# Altium PCB DE-180417.PcbDoc
Units mm, origin at the board's own origin, x right, y up, seen from the top; angles counter-clockwise.
Board outline 138.68 x 62.38 mm, 2 copper layers (Top Layer, Bottom Layer); 113 components, 89 nets, 384 pads, 0 vias.
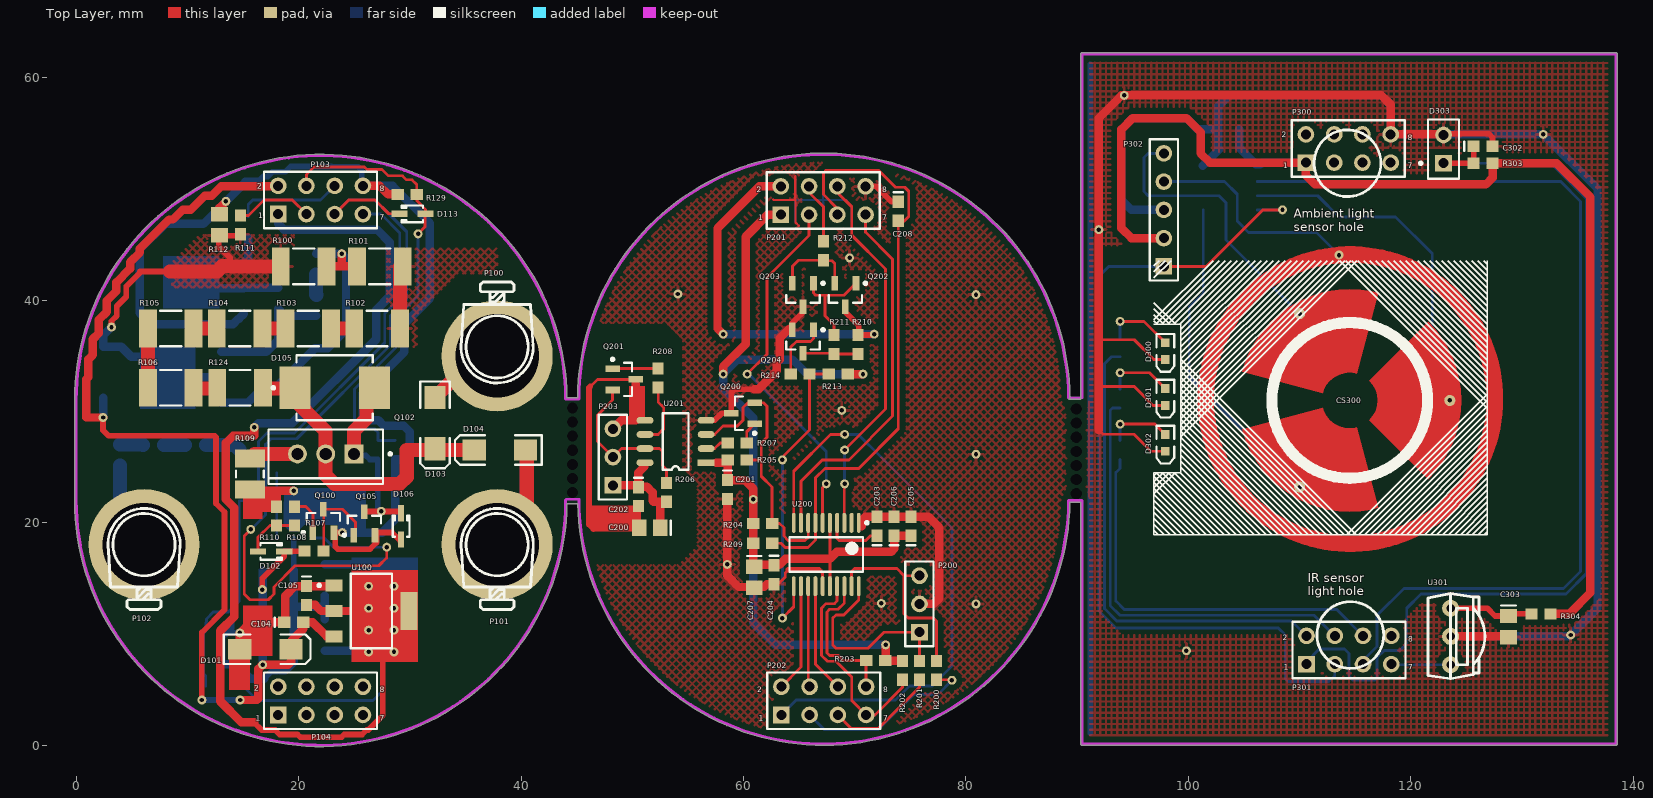
[diagram p0: Top Layer view]
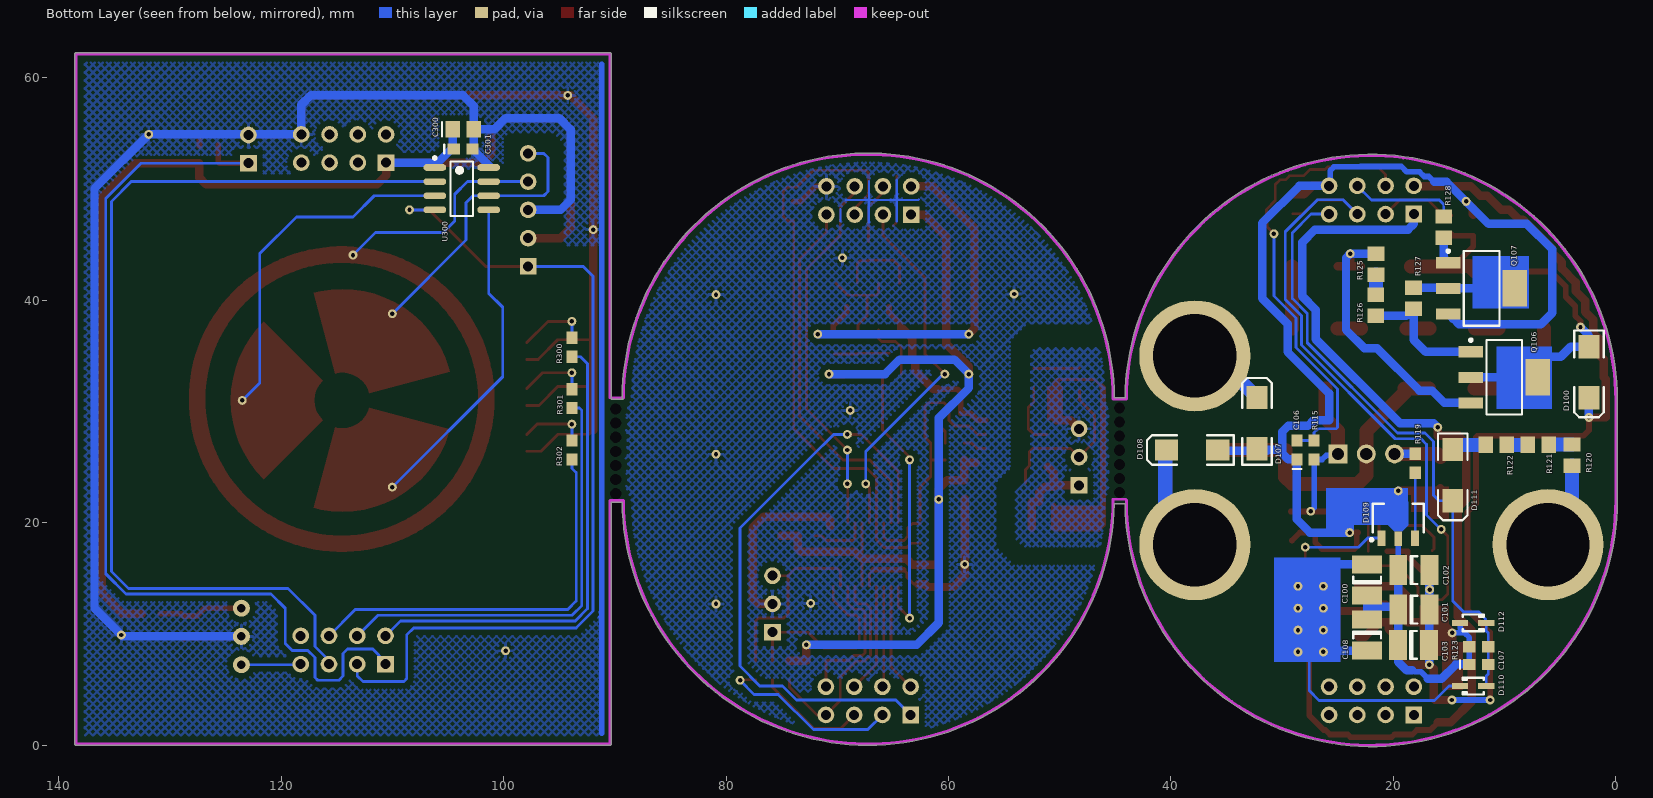
[diagram p1: Bottom Layer view, seen from below]

## Layer stack, top to bottom
Top Solder: solder mask 0.0102, Solder Resist, Dk 3.5
Top Layer: signal copper 0.0356
Dielectric 1: dielectric 0.32, FR-4, Dk 4.8
Bottom Layer: signal copper 0.0356
Bottom Solder: solder mask 0.0102, Solder Resist, Dk 3.5

## Board outline
-0.127,22 ccw(c22,22) 44.126,21.717 45.088,21.717 ccw(c67.212,22.115) 89.338,21.864 90.297,21.864 90.297,0.127 ccw(c90.424,0.127) 90.424,0 138.424,0 ccw(c138.424,0.127) 138.551,0.127 138.551,62.127 ccw(c138.424,62.127) 138.424,62.254 90.424,62.254 ccw(c90.424,62.127) 90.297,62.127 90.297,31.115 89.244,31.115 ccw(c89.212,31.239) 89.339,31.239 ccw(c89.212,31.239) 89.339,31.239 ccw(c67.212,31.115) 45.085,31.242 44.126,31.242 ccw(c22,31) -0.127,31

## Design rules (kind name [scope] priority, off if disabled: settings)
Clearance [All] p1: gap=0.254 except(0.508: Arc-Poly Track-Poly SMDPad-Poly THPad-Poly Via-Poly Fill-Poly Poly-Poly)
PolygonConnect [All] p1: connectstyle=Relief reliefconductorwidth=0.254 reliefentries=4 polygonreliefangle="90 Angle" airgapwidth=0.254
RoutingVias [All] p1: holewidth=0.711 width=1.27 viastyle="Through Hole" minholewidth=0.711 minwidth=1.27 maxholewidth=0.711 maxwidth=1.27
SolderMaskExpansion [All] p1: expansion=0.102
Width [All] p1: maxlimit=4 minlimit=0.127 preferedwidth=0.762
30 further rules are at their usual default settings.

## Classes and differential pairs
component class DE-180417_01: C100 C101 C102 C103 C104 C105 C106 C107 C108 D100 D101 D102 D103 D104 D105 D106 D107 D108 D109 D110 D111 D112 D113 P100 P101 P102 P103 P104 Q100 Q102 Q105 Q106 Q107 R100 R101 R102 R103 R104 R105 R106 R107 R108 R109 R110 R111 R112 R115 R119 R120 R121 R122 R123 R124 R125 R126 R127 R128 R129 U100
component class DE-180417_02: C200 C201 C202 C203 C204 C205 C206 C207 C208 P200 P201 P202 P203 Q200 Q201 Q202 Q203 Q204 R200 R201 R202 R203 R204 R205 R206 R207 R208 R209 R210 R211 R212 R213 R214 U200 U201
component class DE-180417_03: C300 C301 C302 C303 CS300 D300 D301 D302 D303 P300 P301 P302 R300 R301 R302 R303 R304 U300 U301

## Components (designator, comment, footprint, x,y, rotation, side; value= is the part's Value field where it differs from the comment)
C100 "C1210" 1210 22.352,14.859 r90 bottom
C101 "C1210" 1210 18.161,12.192 r180 bottom
C102 "C1210" 1210 18.161,15.748 r180 bottom
C103 "C1210" 1210 18.186,9.017 r180 bottom
C104 "100nF" 0603 19.558,11.049 r0 top
C105 "100nF" 0603 20.701,13.462 r270 top
C106 "22nF" 0603 28.677,26.543 r90 bottom
C107 "100nF" 0603 12.319,7.264 r180 bottom
C108 "C1210" 1210 22.352,9.906 r270 bottom
C200 "50V" 0805 51.562,19.558 r180 top
C201 "100nF" 0603 58.547,22.987 r270 top
C202 "100nF" 0603 50.546,22.352 r270 top
C203 "50V" 0603 72.009,19.685 r90 top
C204 "50V" 0603 62.738,15.328 r270 top
C205 "50V" 0603 75.057,19.685 r90 top
C206 "50V" 0603 73.533,19.685 r90 top
C207 "50V" 0805 60.96,15.113 r270 top
C208 "220nF" 0603 73.914,48.006 r270 top
C300 "50V" 0805 103.632,55.372 r180 bottom
C301 "50V" 0603 103.632,53.594 r180 bottom
C302 "50V" 0603 126.492,53.848 r0 top
C303 "10uF" 0805 128.778,10.668 r270 top
CS300 "Small QTouch Wheel" ? 114.5,31 r270 top
D100 "1N4007" DO214 2.413,33.528 r270 bottom
D101 "SMA" DO214 17.018,8.636 r0 top
D102 "8V2" SOD323 17.526,17.424 r0 top
D103 "S3M" DO214 32.258,28.956 r270 top
D104 "S3M" DO214 38.1,26.543 r180 top
D105 "P4SMA400A" ONSC-SMC-2-403-03_V 23.241,32.131 r0 top
D106 "16V" SOD323 29.21,19.685 r90 top
D107 "S3M" DO214 32.258,28.956 r90 bottom
D108 "S3M" DO214 38.1,26.543 r0 bottom
D109 "MCR100-8" INF-SOT89_N 19.558,20.168 r90 bottom
D110 "1N4148" SOD323 12.819,5.309 r0 bottom
D111 "1N4007" DO214 14.656,24.282 r270 bottom
D112 "1N4148" SOD323 12.819,10.998 r180 bottom
D113 "1N4148" SOD323 30.226,47.777 r180 top
D300 "LED_RED" 1.6X0.8X0.8 97.917,35.433 r270 top
D301 "LED_GREEN" 1.6X0.8X0.8 97.917,31.305 r270 top
D302 "LED_BLUE" 1.6X0.8X0.8 97.917,27.178 r270 top
D303 "Photo Sen" PIN2 122.936,52.324 r90 top
P100 "Single Wire Lug" "Single Wire Lug"#1 37.846,35.814 r0 top
P101 "Single Wire Lug" "Single Wire Lug"#2 37.846,18.034 r180 top
P102 "Single Wire Lug" "Single Wire Lug"#2 6.096,18.034 r180 top
P103 "CON_A" HDR2X4 18.161,47.752 r0 top locked
P104 "CON_B" HDR2X4 18.161,2.718 r0 top locked
P200 "ICSP" HDR1X3 75.819,10.16 r90 top
P201 "CON_A" HDR2X4 63.348,47.701 r0 top locked
P202 "CON_B" HDR2X4 63.398,2.718 r0 top locked
P203 "COM" HDR1X3 48.26,23.368 r90 top
P300 "CON_A" HDR2X4 110.566,52.375 r0 top locked
P301 "CON_B" HDR2X4 110.617,7.29 r0 top locked
P302 "ICSP" HDR1X5 97.79,43.053 r90 top
Q100 "MMBT2222" SOT23_N 22.225,20.168 r90 top
Q102 "NGTB15N60EG" ONSC-TO-220-3-221A-09 22.428,26.187 r270 top
Q105 "MMBT2222" SOT23_N 25.908,19.939 r90 top
Q106 "PBHV9540Z" SOT223_N 10.033,33.071 r180 bottom
Q107 "PBHV8540Z" SOT223_N 12.065,41.072 r180 bottom
Q200 "MMBT3906" SOT23_N 59.944,29.845 r180 top
Q201 "MMBT3906" SOT23_N 49.276,32.893 r0 top
Q202 "MMBT2222" SOT23_N 69.154,40.479 r270 top
Q203 "MMBT3906" SOT23_N 65.344,40.479 r270 top
Q204 "MMBT2222" SOT23_N 65.344,36.288 r270 top
R100 "1812" 12-1812 20.447,43.053 r0 top
R101 "1812" 12-1812 27.305,43.053 r0 top
R102 "1812" 12-1812 27.051,37.465 r180 top
R103 "1812" 12-1812 20.87,37.465 r180 top
R104 "1812" 12-1812 14.69,37.465 r180 top
R105 "1812" 12-1812 8.509,37.465 r180 top
R106 "1812" 12-1812 8.509,32.131 r0 top
R107 "150K" ERA-0603 21.387,17.45 r0 top
R108 "47K" ERA-0603 19.634,20.599 r90 top
R109 "1210" 14-1210 15.621,24.384 r90 top
R110 "47K" ERA-0603 18.009,20.599 r90 top
R111 "100K" ERA-0603 14.757,46.787 r270 top
R112 "0802" ERA-0805 12.878,46.787 r270 top
R115 "3K3" ERA-0603 27.127,26.543 r270 bottom
R119 "22R" ERA-0603 18.034,25.349 r90 bottom
R120 "0802" ERA-0805 3.937,26.086 r90 bottom
R121 "0802" ERA-0805 6.96,27 r0 bottom
R122 "0802" ERA-0805 10.744,27 r0 bottom
R123 "10K" ERA-0603 12.319,8.853 r180 bottom
R124 "1812" 12-1812 14.732,32.131 r0 top
R125 "220K" ERA-0805 21.565,43.256 r270 bottom
R126 "220K" ERA-0805 21.59,39.548 r90 bottom
R127 "10K" ERA-0805 18.186,40.183 r270 bottom
R128 "3K3" ERA-0805 15.469,46.584 r270 bottom
R129 "220K" ERA-0603 29.769,49.53 r0 top
R200 "1K" ERA-0603 77.343,6.731 r90 top
R201 "1K" ERA-0603 75.819,6.731 r90 top
R202 "10K" ERA-0603 74.295,6.731 r90 top
R203 "10K" ERA-0603 71.882,7.62 r0 top
R204 "10K" ERA-0603 61.722,19.939 r180 top
R205 "2K2" ERA-0603 59.436,25.654 r0 top
R206 "2K2" ERA-0603 53.086,22.733 r90 top
R207 "1K" ERA-0603 59.436,27.178 r180 top
R208 "1K" ERA-0603 52.324,33.02 r270 top
R209 "15K" ERA-0603 61.722,18.161 r180 top
R210 "10K" ERA-0603 70.297,36.034 r270 top
R211 "1K" ERA-0603 68.138,36.034 r270 top
R212 "15K" ERA-0603 67.183,44.45 r90 top
R213 "47K" ERA-0603 68.519,33.367 r180 top
R214 "3K3" ERA-0603 65.09,33.367 r0 top
R300 "100R" ERA-0603 93.853,35.776 r270 bottom
R301 "22R" ERA-0603 93.853,31.159 r270 bottom
R302 "22R" ERA-0603 93.853,26.543 r270 bottom
R303 "100K" ERA-0603 126.492,52.324 r180 top
R304 "220R" ERA-0603 131.699,11.811 r180 top
U100 "REG1117-3.3" ZZ311 26.543,12.065 r270 top
U200 "STM32F030F4P6" STM-TSSOP20_N 67.437,17.145 r270 top
U201 "ADuM1201" SOP8 56.642,25.4 r180 top
U300 "PIC12F1822T-I/SN" MCHP-SOIC-SN8_N 103.759,50.038 r180 bottom
U301 "38kHZ IR receiver" TSOP48 123.571,9.779 r90 top

## Footprints (in the part's own frame and the unit in brackets; to place one, negate y for a bottom-side part, rotate by r counter-clockwise, add the part's x,y. Pads: shape width x height; smd on the part's side, far side on the other; paste and mask are expansions set on the pad)
1.6X0.8X0.8 [mm] "SM LED; 2 Flat Leads"
  rect 0.8x0.8 smd: 1(-0.75,0) 2(0.75,0)
  silkscreen extent -1.55,-0.8 1.85,0.8
12-1812 [mm] "Chip Resistor; Body 4.5 x 3.2 mm (LxW typ)"
  rect 1.6x3.4 smd: 1(-2.05,0) 2(2.05,0)
  silkscreen extent -0.95,-1.6 0.95,1.6
14-1210 [mm] "Chip Resistor; Body 3.2 x 2.5 mm (LxW typ)"
  rect 1.6x2.7 smd: 1(-1.4,0) 2(1.4,0)
  silkscreen extent -0.3,-1.25 0.3,1.25
0603 [mm] "Chip Capacitor; Body 1.6 x 0.8 mm (LxW typ)"
  rect 1.1x1 smd: 1(-0.85,0) 2(0.85,0)
  silkscreen extent -1.7,-0.4 -1.7,0.4
0805 [mm] "Chip Capacitor; Body 2.0 x 1.2 mm (LxW typ)"
  rect 1.3x1.5 smd: 1(-0.95,0) 2(0.95,0)
  silkscreen extent -1.9,-0.65 -1.9,0.65
1210 [mm] "Chip Capacitor; Body 3.2 x 2.5 mm (LxW typ)"
  rect 1.6x2.7 smd: 1(-1.4,0) 2(1.4,0)
  silkscreen extent -0.3,-1.25 0.3,1.25
DO214 [mm] "DO-214-AC/SMA; 2 C-Bend Leads; Body 5.3 x 2.6 mm, inc. leads (LxW)"
  rect 2.1x1.85 smd: 1(-2.3,0) 2(2.3,0)
  silkscreen extent -3.75,-1.33 4.05,1.33
ERA-0603 [mm] "Chip Resistor; Body 1.6 x 0.8 mm (LxW typ)"
  rect 1.1x1 smd: 1(-0.85,0) 2(0.85,0)
ERA-0805 [mm] "Chip Resistor; Body 2 x 1.3 mm (LxW typ)"
  rect 1.3x1.5 smd: 1(-0.95,0) 2(0.95,0)
HDR1X3 [mm] "Connector; Header; 3 Position"
  rect 1.5x1.5 hole 0.9: 1(0,0)
  round 1.5 hole 0.9: 2(2.54,0) 3(5.08,0)
  silkscreen extent -1.27,-1.27 6.35,1.27
HDR1X5 [mm] "Connector; Header; 5 Position"
  rect 1.5x1.5 hole 0.9: 1(0,0)
  round 1.5 hole 0.9: 2(2.54,0) 3(5.08,0) 4(7.62,0) 5(10.16,0)
  silkscreen extent -1.27,-1.27 11.43,1.27
HDR2X4 [mm] "Connector; Header; 4x2 Position"
  rect 1.5x1.5 hole 0.9: 1(0,0)
  round 1.5 hole 0.9: 2(0,2.54) 3(2.54,0) 4(2.54,2.54) 5(5.08,0) 6(5.08,2.54) 7(7.62,0) 8(7.62,2.54)
  silkscreen extent -1.27,-1.27 8.89,3.81
INF-SOT89_N [mm] "SOT89, 3-Leads, Body 4.5x2.5 mm, Pitch 1.5 mm, IPC Medium Density"
  rect 1.4x0.7 smd: 1(-1.55,1.5) 3(-1.55,-1.5)
  rect 1.3x0.7 smd: 2(-1.6,0)
  Top Layer region: -0.95,0.35 -0.4,0.9 1.7,0.9 2.25,0.35 2.25,-0.35 1.7,-0.9 -0.4,-0.9 -0.95,-0.35
  silkscreen extent -1.82,-2.3 1.55,2.53, body extent -1.05,-2.3 1.55,2.3, height 1.6
MCHP-SOIC-SN8_N [mm] "SOIC, 8-Leads, Body 4.9x3.9mm, Pitch 1.27mm, IPC Medium Density"
  oval 2.05x0.6 smd: 1(-2.425,1.905) 2(-2.425,0.635) 3(-2.425,-0.635) 4(-2.425,-1.905) 5(2.425,-1.905) 6(2.425,-0.635) 7(2.425,0.635) 8(2.425,1.905)
  silkscreen extent -2.55,-2.45 1,2.88, body extent -1.95,-2.45 1.95,2.45, height 1.75
ONSC-SMC-2-403-03_V [mil] "Molded, 2-Leads, Body 6.86x5.84mm"
  rect 110x150 smd: 1(-140.49,0) 2(140.49,0)
  silkscreen extent -222,-115 135,115, body extent -135,-115 135,115, height 99
ONSC-TO-220-3-221A-09 [mm] "FM, 3-Leads, Body 10.3x4.85mm, Pitch 2.54mm"
  rect 1.7x1.7 hole 1.1: 1(0,2.54)
  round 1.7 hole 1.1: 2(0,0) 3(0,-2.54)
  silkscreen extent -2.2,-5.15 2.7,5.93, body extent -2.18,-5.15 2.67,5.15, height 19.85
PIN2 [mm] "Photosensitive Diode; 2 Leads"
  rect 1.5x1.5 hole 0.9: 1(0,0)
  round 1.5 hole 0.9: 2(2.54,0)
  silkscreen extent -1.4,-1.4 3.94,2.17
"Single Wire Lug"#1 [mm] "Single Wire terminal Connector"
  round 10 hole 7.5: 1(0,-0.814)
  silkscreen extent -3.25,-3.25 3.24,5.84, body extent -3.5,-3.5 3.5,3.5, height 11.5
"Single Wire Lug"#2 [mm] "Single Wire terminal Connector"
  round 10 hole 7.5: 1(0,0)
  silkscreen extent -3.25,-3.25 3.24,5.84, body extent -3.5,-3.5 3.5,3.5, height 11.5
SOD323 [mm] "SOD-323/SC-76; 2 Leads; Body 1.7 x 1.3 mm, (LxW)"
  rect 1.45x0.55 smd: 1(1.175,0) 2(-1.175,0)
  silkscreen extent -0.95,-0.75 0.95,0.75
SOP8 [mm]
  rect 1.52x0.61 smd: 1(0,0)
  oval 1.52x0.61 smd: 2(0,-1.27) 3(0,-2.54) 4(0,-3.81) 5(5.5,-3.81) 6(5.5,-2.54) 7(5.5,-1.27) 8(5.5,0)
  silkscreen extent 1.59,-4.44 3.91,0.64
SOT23_N [mm] "SOT23, 3-Leads, Body 2.9x1.3mm, Pitch 0.95mm, Lead Span 2.3mm, IPC Medium Density"
  rect 1.3x0.6 smd: 1(-1.05,0.95) 2(-1.05,-0.95) 3(1.05,0)
  silkscreen extent -1.17,-1.5 0.7,1.92, body extent -0.7,-1.5 0.7,1.5, height 1.1
SOT223_N [mm] "SOT223, 4-Leads, Body 6.5x3.5mm, Pitch 2.3mm, Lead Span 7mm, IPC Medium Density"
  rect 2.2x1 smd: 1(-3,2.3) 2(-3,0) 3(-3,-2.3)
  rect 2.2x3.3 smd: 4(3,0)
  silkscreen extent -3.13,-3.35 1.6,3.47, body extent -1.85,-3.35 1.85,3.35, height 1.8
STM-TSSOP20_N [mm] "SOP, 20-Leads, Body 6.6x4.5mm, Pitch 0.65mm, IPC Medium Density"
  oval 1.8x0.35 smd: 1(-2.85,2.925) 2(-2.85,2.275) 3(-2.85,1.625) 4(-2.85,0.975) 5(-2.85,0.325) 6(-2.85,-0.325) 7(-2.85,-0.975) 8(-2.85,-1.625) 9(-2.85,-2.275) 10(-2.85,-2.925) 11(2.85,-2.925) 12(2.85,-2.275) 13(2.85,-1.625) 14(2.85,-0.975) 15(2.85,-0.325) 16(2.85,0.325) 17(2.85,0.975) 18(2.85,1.625) 19(2.85,2.275) 20(2.85,2.925)
  silkscreen extent -2.97,-3.3 1.55,3.78, body extent -2.25,-3.3 2.25,3.3, height 1.2
TSOP48 [mil] "38kHZ IR receiver"
  round 60 hole 30: 1(-100,0) 2(0,0) 3(100,0)
  silkscreen extent -150,-121 152,80, body extent -150,-130 150,80, height 274
ZZ311 [mm] "SOT-223/SC-73; 4 Leads; Body 6.7 x 7.3 mm, inc. leads (LxW max)"
  rect 1.1x1.55 smd: 1(-2.3,-3.375) 2(0,-3.375) 3(2.3,-3.375)
  rect 3.45x1.55 smd: 4(0,3.375)
  silkscreen extent -3.35,-4.82 3.35,1.85
? [mm]
  round 1 smd paste-0.5: 1(0,9) 2(-7.794,-4.5) 3(7.794,-4.5)
  Top Layer region: 7.071,7.071 7.08,7.08 7.08,7.08 6.352,7.739 5.562,8.325 4.72,8.83 3.831,9.25 2.906,9.581 1.953,9.82 0.981,9.964 0,10.012 -0.981,9.964 -1.953,9.82 -2.906,9.581 -3.831,9.25 -4.72,8.83 -5.562,8.325 -6.352,7.739 -7.08,7.08 -7.08,7.08 -1.768,1.768 -1.776,1.776 -1.776,1.776 -1.396,2.089 -0.961,2.321 -0.49,2.464 0,2.512 0.49,2.464 0.961,2.321 1.396,2.089 1.776,1.776 1.776,1.776 7.071,7.071
  Top Layer region: -9.659,2.588 -9.661,2.589 -9.82,1.953 -9.964,0.981 -10.012,0 -9.964,-0.981 -9.82,-1.953 -9.581,-2.906 -9.25,-3.831 -8.83,-4.72 -8.325,-5.562 -7.739,-6.352 -7.08,-7.08 -6.352,-7.739 -5.562,-8.325 -4.72,-8.83 -3.831,-9.25 -2.906,-9.581 -2.589,-9.661 -0.647,-2.415 -0.647,-2.416 -0.961,-2.321 -1.396,-2.089 -1.776,-1.776 -2.089,-1.396 -2.321,-0.961 -2.464,-0.49 -2.512,0 -2.464,0.49 -2.416,0.647 -9.659,2.588
  Top Layer region: 2.588,-9.659 2.589,-9.661 2.906,-9.581 3.831,-9.25 4.72,-8.83 5.562,-8.325 6.352,-7.739 7.08,-7.08 7.739,-6.352 8.325,-5.562 8.83,-4.72 9.25,-3.831 9.581,-2.906 9.82,-1.953 9.964,-0.981 10.012,0 9.964,0.981 9.82,1.953 9.661,2.589 2.415,0.647 2.416,0.647 2.464,0.49 2.512,0 2.464,-0.49 2.321,-0.961 2.089,-1.396 1.776,-1.776 1.396,-2.089 0.961,-2.321 0.647,-2.416 2.588,-9.659

## Part data
C100 C101 C102 C103 C108: "Ceramic Chip Capacitor - Standard"
C104 C105 C106 C107 C201 C202 C203 C204 C205 C206 C208 C301 C302: library part C0603, "Ceramic Chip Capacitor - Standard"
C200 C207 C300 C303: library part C0805, "Ceramic Chip Capacitor - Standard"
CS300: library part SmallQTouchWheel
D100 D111: library part BZG03C10, "Silicon Zener Diode (3W)"
D101 D103 D104 D107 D108: library part BZG05C15, "Silicon Zener Diode (3W)"
D102 D106 D110 D112 D113: library part 1PS76SB10, "Schottky Barrier Diode"
D105: library part 1SMC9.0AT3G, "1500 W Peak Power Zener Transient Voltage Suppressor, Unidirectional, 2-Pin SMC, Pb-Free, Tape and Reel"
D109: library part BAW78D, "Silicon Switching Diode, SOT89, Reel, Green"
D300 D301 D302: library part HSMZ-C190, "High Performance Chip LED, Red"
D303: "Photosensitive Diode"
P100 P101 P102: library part "Wire Lug"
P103 P104 P201 P202 P300 P301: library part "Header 4X2", "Header, 4-Pin, Dual row"
P200 P203: library part "Header 3", "Header, 3-Pin"
P302: library part "Header 5", "Header, 5-Pin"
Q100 Q105 Q202 Q204: library part BC817, "NPN General-purpose Transistor"
Q102: "IGBT - Short-Circuit Rated, 3-Pin TO-220, Pb-Free, Tube"
Q106: library part BCP51, "PNP Medium Power Transistor"
Q107: library part BCP54, "NPN Medium Power Transistor"
Q200 Q201 Q203: library part BC807, "PNP General-purpose Transistor"
R100 R101 R102 R103 R104 R105 R106 R124: library part ERJ12, "Thick Film Chip Resistor, 1 Ohm to 10M Ohm Range, 5% Tolerance, 1812 Size, 0.5 W"
R107 R108 R110 R111 R115 R119 R123 R129 R200 R201 R202 R203 R204 R205 R206 R207 R208 R209 R210 R211 R212 R213 R214 R300 R301 R302 R303 R304: library part ERAV, "Metal Film Thermosensitive Chip Resistor, 0.56 Ohm to 10k Ohm Range, 5% Tolerance, 0603 Size, 0.063 W"
R109: library part ERJ14, "Thick Film Chip Resistor, 1 Ohm to 10M Ohm Range, 5% Tolerance, 1210 Size, 0.25 W"
R112 R120 R121 R122 R125 R126 R127 R128: library part ERA6Y, "Rectangular Thick Film Chip Resistor, 10 Ohm to 1M Ohm Range, 0.1% and 0.5% Tolerance, 0805 Size, 0.1 W"
U100: "800mA and 1A Low Dropout Positive Regulator 2.85V, 3.3V, 5V, and Adjustable"
U200: "ARM Cortex-M0 32-bit MCU, 16 KB Flash, 4 KB Internal RAM, 15 I/Os, 20-pin TSSOP, -40 to 85 degC, Tube"
U201: "Digital Isolator"
U300: "Flash Microcontroller with XLP Technology, 32 MHz, 5 I/O, -40 to 85 degC, 8-pin SOIC (SN8), Tape and Reel"
U301: library part TSOP48

## Free pads (board coordinates)
  round 0.8 hole 0.4: 0(2.413,29.464) 0(3.175,37.592) 0(11.303,4.064) 0(13.462,48.895) 0(14.718,10.095) 0(14.732,4.064) 0(15.697,19.406) 0(16.002,28.575) 0(16.739,13.995) 0(16.764,7.239) 0(19.558,22.86) 0(23.876,44.196) 0(23.935,19.118) 0(26.289,8.382) 0(26.289,10.351) 0(26.289,12.319) 0(26.289,14.287) 0(27.432,21.031) 0(27.915,17.805) 0(28.575,8.382) 0(28.575,10.351) 0(28.575,12.319) 0(28.575,14.287) 0(30.734,45.974) 0(54.102,40.565) 0(58.166,33.367) 0(58.166,36.957) 0(58.547,16.256) 0(60.325,33.367) 0(60.872,22.098) 0(63.5,11.43) 0(63.5,25.654) 0(67.437,23.495) 0(68.834,30.099) 0(69.084,23.495) 0(69.088,26.543) 0(69.088,27.94) 0(69.531,43.815) 0(70.739,33.367) 0(71.755,36.957) 0(72.39,12.751) 0(72.771,9.017) 0(78.74,5.842) 0(80.899,12.7) 0(80.899,26.162) 0(80.899,40.513) 0(91.948,46.355) 0(93.853,28.867) 0(93.853,33.484) 0(93.853,38.1) 0(94.234,58.42) 0(99.822,8.495) 0(108.458,48.133) 0(110,23.206) 0(110,38.794) 0(113.538,44.069) 0(123.5,31) 0(131.902,54.915) 0(134.366,9.906)
  round 0 hole 1: RUPA(44.628,22.708) RUPA(44.628,23.978) RUPA(44.628,25.248) RUPA(44.628,26.518) RUPA(44.628,27.788) RUPA(44.628,29.058) RUPA(44.628,30.328) RUPA(89.916,22.606) RUPA(89.916,23.876) RUPA(89.916,25.146) RUPA(89.916,26.416) RUPA(89.916,27.686) RUPA(89.916,28.956) RUPA(89.916,30.226)

## Nets (pads, with @x,y where several pads share a name; then routed paths per layer and width w, separated by ;. In a path a pad name is that pad's centre, name@x,y a point inside that pad or via, vN(x,y) a via of type N, cw(c..) or ccw(c..) an arc to the next point about the centre after c; other vN are vias at no path point)
+3V3_1: C100.2 C105.2 C108.2 D110.1 P103.1 pad.0@16.002,28.575 pad.0@26.289,8.382 pad.0@26.289,10.351 pad.0@26.289,12.319 pad.0@26.289,14.287 pad.0@28.575,8.382 pad.0@28.575,10.351 pad.0@28.575,12.319 pad.0@28.575,14.287 U100.2 U100.4 | length 114.8
  Top Layer w0.508: 16.002,2.048 16.682,1.368 17.888,1.368 18.291,0.965 19.895,0.965 20.139,0.721 23.862,0.721 24.105,0.965 25.709,0.965 26.113,1.368 26.26,1.368 27.559,2.667 27.559,7.874
  Top Layer w0.762: 16.002,2.048 14.859,2.048 12.954,3.953 12.954,10.287 14.224,11.557 14.224,21.333 13.462,22.095 13.462,27.178 14.097,27.813 16.002,27.813 pad.0@16.002,28.575 ; C105.2 21.475,12.612 22.022,12.065 U100.2 25.298,12.065 25.349,12.014
  Bottom Layer w0.254: D110.1 15.011,5.309 16.307,4.013 26.67,4.013 27.559,4.902 27.559,7.722 27.534,7.747
  Bottom Layer w0.762: pad.0@16.002,28.575 16.383,28.956 19.431,28.956 26.975,36.5 26.975,39.141 28.194,40.36 28.194,45.212 27.051,46.355 18.669,46.355 18.161,46.863 P103.1 ; C108.2 26.165,8.506 pad.0@26.289,8.382 ; C100.2 26.286,16.259 26.289,16.256
+3V3_2: C201.1 C204.1 C205.1 C206.1 C207.1 P201.1 pad.0@58.166,33.367 pad.0@60.872,22.098 pad.0@70.739,33.367 pad.0@72.771,9.017 R202.2 R203.2 R204.2 R205.1 R209.2 R213.1 U200.5 U200.16 U201.1 | length 105.3
  Top Layer w0.254: U200.16 67.762,16.764 U200.5
  Top Layer w0.762: 57.531,25.4 58.332,25.4 R205.1 58.586,23.837 60.11,23.837 60.872,23.075 60.872,22.098 R204.2 R209.2 60.872,16.566 61.221,16.217 C204.1@62.699,16.217 ; pad.0@58.166,33.401 58.166,34.036 60.198,36.068 60.198,45.72 62.179,47.701 P201.1 ; C204.1 C204.1@62.699,16.217 ; R213.1 pad.0@70.739,33.367 ; pad.0@72.771,9.017 72.771,7.659 R203.2 72.771,7.581 R202.2 ; C205.1 C206.1 73.533,17.653 73.279,17.399 68.397,17.399 67.762,16.764 63.767,16.764 63.22,16.217 C204.1@62.699,16.217
  Bottom Layer w0.762: pad.0@70.739,33.367 65.693,33.367 64.389,34.671 59.47,34.671 58.166,33.367 58.166,32.131 60.872,29.425 60.872,22.098 60.872,11.01 62.865,9.017 pad.0@72.771,9.017
+3V3_3: C300.1 C301.1 P300.1 P302.2 R303.1 R304.1 U300.1 | length 111
  Top Layer w0.762: P302.2 94.869,45.593 93.98,46.482 93.98,55.372 94.996,56.388 99.822,56.388 101.092,55.118 101.092,53.213 101.93,52.375 P300.1 110.566,51.232 111.379,50.419 126.746,50.419 127.342,51.015 R303.1 133.096,52.324 136.144,49.276 136.144,13.716 134.239,11.811 R304.1
  Bottom Layer w0.762: C300.1 104.582,53.694 106.062,52.214 106.455,52.214 106.616,52.375 P300.1
+5V_COM: C200.1 C202.1 P203.1 R206.1 U201.8 | length 9.6
  Top Layer w0.762: P203.1 50.38,23.368 50.507,23.241 C202.1@50.546,23.241 ; 51.054,25.019 50.546,24.511 C202.1@50.546,23.241 ; C200.1 52.512,21.822 52.451,21.883 51.904,21.883 51.816,21.971 51.816,22.733 51.308,23.241 C202.1@50.546,23.241
+15V_1: C101.2 C102.2 C103.2 C104.2 D100.2 D101.2 D102.1 P103.2 pad.0@2.413,29.464 pad.0@11.303,4.064 pad.0@14.732,4.064 pad.0@16.739,13.995 pad.0@16.764,7.239 R107.1 U100.3 | length 104.8
  Top Layer w0.508: pad.0@2.413,29.464 2.413,28.321 2.921,27.813 12.446,27.813 12.573,27.686 12.573,21.727 13.335,20.965 13.335,12.179 11.303,10.147 pad.0@11.303,4.064 ; pad.0@16.739,13.995 16.739,15.011 18.701,16.974 D102.1 18.726,17.45 R107.1
  Top Layer w0.762: pad.0@2.413,29.464 0.889,29.464 0.889,32.891 1.09,33.092 1.09,34.687 1.491,35.088 1.491,36.495 2.048,37.052 2.048,38.262 2.757,38.971 2.757,39.973 3.612,40.829 3.612,41.616 4.844,42.849 4.844,43.416 5.735,44.306 5.735,44.648 8.352,47.265 8.694,47.265 9.587,48.158 10.312,48.158 11.542,49.388 12.172,49.388 13.027,50.243 P103.2@18.112,50.243 ; pad.0@14.732,4.064 16.256,4.064 16.383,4.191 16.383,6.858 16.764,7.239 19.05,7.239 19.318,7.507 D101.2 19.318,9.361 20.408,10.451 C104.2 21.26,11.049 22.544,9.765 U100.3
  Bottom Layer w0.508: pad.0@11.303,4.064 pad.0@14.732,4.064
  Bottom Layer w0.762: pad.0@2.413,29.464 D100.2 ; C103.2@16.761,8.636 C101.2 C102.2 ; pad.0@16.764,7.239 16.786,7.261 C103.2
+15V_2: P201.2 pad.0@58.166,36.957 pad.0@71.755,36.957 Q202.3 R210.1 | length 35.1
  Top Layer w0.508: Q202.3 69.154,38.923 70.358,37.719 70.358,36.945 R210.1 71.682,36.884 pad.0@71.755,36.957
  Top Layer w0.762: pad.0@58.166,36.957 57.658,37.465 57.658,46.482 61.417,50.241 P201.2
  Bottom Layer w0.762: pad.0@58.166,36.957 pad.0@71.755,36.957
+15V_3: P300.2
AMBIENT_LIGHT_2: P202.1 pad.0@69.088,27.94 U200.10 | length 53.3
  Top Layer w0.254: U200.10 64.512,24.634 67.818,27.94 pad.0@69.088,27.94
  Bottom Layer w0.254: P202.1 64.745,4.064 73.66,4.064 74.93,5.334 76.962,5.334 78.74,7.112 78.74,19.519 72.351,25.908 70.319,27.94 pad.0@69.088,27.94
AMBIENT_LIGHT_3: C302.1 D303.1 P301.1 R303.2 | length 87.2
  Top Layer w0.508: D303.1 125.515,52.324 125.642,52.451 C302.1 C302.1@125.642,53.975
  Bottom Layer w0.254: P301.1 110.617,7.493 111.76,8.636 114.046,8.636 114.427,8.255 114.427,6.223 114.808,5.842 116.713,5.842 116.967,6.096 116.967,7.874 117.602,8.509 118.999,8.509 119.634,9.144 119.634,12.319 120.904,13.589 133.941,13.589 135.763,15.411 135.763,49.149 132.588,52.324 D303.1
CAP1_SENS_1: CS300.1 pad.0@123.5,31 U300.3 | length 31.7
  Bottom Layer w0.254: U300.3 111.633,49.403 113.538,47.498 118.618,47.498 121.92,44.196 121.92,32.58 pad.0@123.5,31
CAP1_SENS_2: CS300.2 P302.5 pad.0@110,38.794 U300.6 | length 25.5
  Bottom Layer w0.254: P302.5 96.393,53.213 96.012,52.832 96.012,49.784 96.393,49.403 U300.6 102.743,49.403 103.378,48.768 103.378,45.416 pad.0@110,38.794
CAP1_SENS_3: CS300.3 pad.0@110,23.206 U300.5 | length 29.6
  Bottom Layer w0.254: U300.5 101.334,40.628 100.076,39.37 100.076,33.13 pad.0@110,23.206
CAP1_SENS_4: P302.4 pad.0@113.538,44.069 U300.7 | length 101.6
  Top Layer w1.5: 127.554,31.115 ccw(c114.554,31.115) 127.554,31.115
  Bottom Layer w0.254: P302.4 U300.7 103.251,50.673 104.394,49.53 104.394,47.117 105.41,46.101 111.506,46.101 pad.0@113.538,44.069
CAP_SEN_RX_2: P202.3 pad.0@78.74,5.842 R200.1 | length 16.6
  Top Layer w0.254: R200.1 78.701,5.881 pad.0@78.74,5.842
  Bottom Layer w0.254: P202.3 67.259,1.397 72.136,1.397 75.311,4.572 77.47,4.572 pad.0@78.74,5.842
CAP_SEN_RX_3: P301.3 P302.1 pad.0@108.458,48.133 U300.4 | length 78.8
  Top Layer w0.254: P302.1 101.6,43.053 106.68,48.133 pad.0@108.458,48.133
  Bottom Layer w0.254: P302.1 92.837,43.053 91.948,42.164 91.948,12.065 93.472,10.541 108.077,10.541 108.712,9.906 108.712,5.969 108.966,5.715 112.649,5.715 113.157,6.223 P301.3 ; U300.4 pad.0@108.458,48.133
CAP_SEN_TX_2: P202.5 R201.1 | length 10
  Top Layer w0.254: P202.5 69.672,1.524 72.136,1.524 75.819,5.207 R201.1
CAP_SEN_TX_3: P301.5 U300.2 | length 87.9
  Bottom Layer w0.254: U300.2 133.477,50.673 135.255,48.895 135.255,15.621 133.731,14.097 119.38,14.097 116.967,11.684 116.967,8.89 115.697,7.62 P301.5
EXTERNAL_CTRL_1: C107.2 D110.2 D111.2 D112.1 P103.7 R123.2 | length 55.1
  Bottom Layer w0.254: D110.2 11.644,6.212 11.469,6.387 C107.2 R123.2 11.469,10.097 11.644,10.272 D112.1 11.709,11.064 11.709,11.354 12.319,11.963 13.665,11.963 14.656,12.954 D111.2 15.886,21.982 16.383,22.479 16.383,27.305 17.145,28.067 19.62,28.067 27.737,36.184 27.737,38.826 29.083,40.172 29.083,46.076 27.407,47.752 P103.7
EXTERNAL_CTRL_2: P201.7 U200.9 | length 33.5
  Top Layer w0.254: U200.9 65.162,23.735 67.081,25.654 69.469,25.654 73.406,29.591 73.406,43.688 70.968,46.126 P201.7
EXTERNAL_CTRL_3: P300.7
FIRE_OUTPUT_1_2: pad.0@63.5,11.43 pad.0@63.5,25.654 R213.2 R214.2 U200.11 | length 28
  Top Layer w0.254: pad.0@63.5,11.43 64.512,12.442 U200.11 ; pad.0@63.5,25.654 63.5,25.908 65.94,28.348 R214.2 R213.2
  Bottom Layer w0.254: pad.0@63.5,11.43 pad.0@63.5,25.654
GND_1: C100.1 C101.1 C102.1 C103.1 C104.1 C105.1 C106.1 C107.1 C108.1 D101.1 D106.2 D107.1 D108.1 D109.2 D112.2 P103.8 pad.0@13.462,48.895 pad.0@14.718,10.095 pad.0@19.558,22.86 pad.0@23.935,19.118 Q100.2 Q105.2 Q107.3 R109.1 R110.2 R112.1 R123.1 R129.1 U100.1 | length 161.1
  Top Layer w0.381: P103.8@25.298,50.292 P103.8
  Top Layer w0.508: pad.0@23.935,19.118 Q100.2 23.295,18.998 23.295,17.853 23.52,17.628 26.416,17.628 27.01,18.222 27.01,19.126 28.391,19.126 D106.2@29.108,18.408
  Top Layer w0.762: R112.1@12.802,47.711 R112.1@12.852,47.762 ; R112.1 12.878,48.311 pad.0@13.462,48.895 ; D101.1 14.718,10.07 15.697,11.049 C104.1 18.796,11.137 18.796,13.426 19.682,14.312 C105.1 23.115,14.312 U100.1 ; R109.1@15.773,23.111 15.773,22.022 16.346,21.449 R110.2 18.009,22.581 18.288,22.86 pad.0@19.558,22.86 ; P103.8 27.28,50.292 28.042,49.53 R129.1
  Bottom Layer w0.508: C107.1 R123.1 13.169,9.689 13.589,10.109 ; D112.2 13.994,10.514 13.589,10.109 ; pad.0@14.718,10.095 14.704,10.109 13.589,10.109 ; 16.332,50.648 16.815,51.13 17.22,51.13 17.64,51.55 18.793,51.55 19.279,52.035 22.92,52.035 22.962,51.994 25.349,51.994 25.679,51.664 25.679,50.394 P103.8 ; 16.891,5.969 17.526,6.604 18.034,6.604 ; D109.2 19.558,15.751 C102.1
  Bottom Layer w0.762: C107.1 14.376,7.264 15.672,5.969 16.891,5.969 ; Q107.3 14.647,38.354 14.605,38.354 14.097,37.846 6.731,37.846 5.715,38.862 5.715,44.286 5.735,44.306 5.735,44.597 8.001,46.863 11.43,46.863 13.462,48.895 15.215,50.648 16.332,50.648 ; 18.288,6.731 18.796,6.731 19.561,7.496 C101.1 ; 19.558,21.971 pad.0@19.558,22.86 ; C102.1 C101.1 ; 20.066,20.066 20.193,20.193 23.749,20.193 23.935,20.007 23.935,19.118 27.5,19.118 28.677,20.295 C106.1 29.452,25.693 29.972,26.213 ; C108.1 22.352,12.446 ; C100.1 22.352,12.446 ; P103.8 28.448,50.292 31.801,46.939 31.801,40.183 29.515,37.897 29.515,35.357 25.781,31.623 25.781,29.21 27.178,29.21 27.686,28.702 29.464,28.702 29.972,28.194 29.972,26.213 ; D108.1@35.47,26.467 31.355,26.467 31.267,26.554 30.314,26.554 29.972,26.213 ; C101.1 19.815,12.446 22.352,12.446
GND_2: C201.2 C203.2 C204.2 C205.2 C206.2 C207.2 C208.1 P200.2 P201.8 pad.0@54.102,40.565 pad.0@58.547,16.256 pad.0@68.834,30.099 pad.0@69.531,43.815 pad.0@72.39,12.751 pad.0@80.899,12.7 pad.0@80.899,26.162 pad.0@80.899,40.513 Q200.3 Q203.3 Q204.2 U200.1 U200.15 U201.4 | length 75.7
  Top Layer w0.203: 62.673,49.061 62.712,49.022 64.643,49.022 ; 64.643,49.061 64.643,51.181 ; 64.668,49.124 64.668,46.999 64.959,46.708
  Top Layer w0.254: C204.2 63.119,14.478 63.754,15.113 63.754,15.494 64.033,15.773 ; 66.777,15.773 67.112,15.438 U200.15
  Top Layer w0.508: U201.4 57.404,29.21 58.039,29.845 Q200.3 58.894,31.716 59.182,32.004 60.96,32.004 ; 64.033,15.773 66.777,15.773 ; Q204.2 64.394,37.978 65.344,38.928 Q203.3 ; P201.8 71.933,50.241 73.318,48.856 C208.1
  Top Layer w0.762: C201.2 58.547,15.24 59.563,14.224 61.849,14.224 62.103,14.478 C204.2 ; 60.96,32.004 61.341,32.004 62.992,33.655 62.992,34.417 63.246,34.671 63.246,36.576 Q204.2@64.135,37.465 ; 70.612,19.685 70.612,20.193 70.954,20.535 C206.2 C205.2 76.62,20.535 77.597,19.558 77.597,13.208 77.089,12.7 P200.2
  Bottom Layer w0.203: 62.673,49.061 62.712,49.022 69.231,49.022 ; 64.638,50.803 64.649,47.092 ; 67.152,50.727 67.164,47.015 ; 69.698,48.187 69.704,47.142
GND_3: C300.2 C301.2 C302.2 C303.2 D300.2 D301.2 D302.2 D303.2 P300.8 P302.3 pad.0@91.948,46.355 pad.0@94.234,58.42 pad.0@99.822,8.495 pad.0@131.902,54.915 pad.0@134.366,9.906 U300.8 U301.2 | length 272.1
  Top Layer w0.254: 91.948,28.321 92.317,27.952 95.111,27.952 96.635,26.428 D302.2 ; 91.948,32.385 92.075,32.258 95.123,32.258 96.826,30.555 D301.2 ; 91.948,36.449 95.123,36.449 96.889,34.683 D300.2
  Top Layer w0.508: D303.2 122.936,54.983 127.008,54.983 127.342,54.649 C302.2
  Top Layer w0.762: 91.948,28.321 91.948,32.385 91.948,36.449 91.948,46.355 91.948,56.388 93.98,58.42 117.348,58.42 118.186,57.582 P300.8 122.885,54.915 D303.2 ; U301.2 128.717,9.779 C303.2
  Bottom Layer w0.203: 91.222,11.938 91.222,11.749 91.427,11.544
  Bottom Layer w0.508: 91.161,1.068 91.161,61.214 ; 91.161,12 91.222,11.938
  Bottom Layer w0.762: P302.3 94.869,48.133 93.98,49.022 93.98,55.372 94.996,56.388 99.822,56.388 100.838,55.372 C300.2 ; U300.8@101.302,52.114 C301.2 102.682,53.694 C300.2 ; U301.2 134.239,9.779 136.779,12.319 136.779,50.038 131.902,54.915 P300.8 118.186,57.582 117.348,58.42 103.632,58.42 102.682,57.47 C300.2
GND_COM: C200.2 C202.2 P203.3 Q201.3 U201.5 | length 29.2
  Top Layer w0.254: 46.228,32.258 46.863,32.893 Q201.3@50.292,32.893
  Top Layer w0.508: 46.228,32.258 46.101,32.131 46.101,19.837 46.507,19.431 ; 46.441,21.275 50.319,21.275 C202.2 50.546,19.624 C200.2
  Top Layer w0.762: P203.3 49.022,29.21 50.292,29.21 50.292,32.512
I2C1_SCL_2: P202.7 R202.1 U200.17 | length 19.7
  Top Layer w0.254: U200.17 68.412,12.964 68.174,12.725 67.412,12.725 67.005,12.319 67.005,8.077 67.539,7.544 68.301,7.544 69.723,6.121 69.723,4.013 P202.7 71.806,2.718 74.295,5.207 R202.1
I2C1_SCL_3: P301.7 U301.1 | length 5.4
  Bottom Layer w0.254: P301.7 118.288,7.239 U301.1
I2C1_SDA_2: P202.8 R203.1 U200.18 | length 13.2
  Top Layer w0.254: U200.18 69.062,12.801 68.478,12.217 67.742,12.217 67.513,11.989 67.513,8.288 67.749,8.052 68.511,8.052 68.956,7.606 71.018,7.606 P202.8
I2C1_SDA_3: P301.8
IGBT_CTRL_1: C106.2 D113.2 P103.4 pad.0@30.734,45.974 R115.1 R129.2 | length 41.3
  Top Layer w0.254: P103.4 20.701,51.308 21.387,51.994 25.898,51.994 26.137,51.755 27.508,51.755 28.072,51.191 29.349,51.191 29.708,50.833 30.193,50.833 30.619,50.407 R129.2 30.619,48.959 31.401,48.177 D113.2 31.369,47.745 31.369,46.609 pad.0@30.734,45.974
  Bottom Layer w0.254: C106.2@28.651,27.418 C106.2 R115.1 27.127,28.118 26.797,28.448 25.146,28.448 25.019,28.575 25.019,32.03 28.753,35.763 28.753,38.405 30.734,40.386 pad.0@30.734,45.974
IGBT_CTRL_2: P201.4 R212.2 | length 5.5
  Top Layer w0.254: P201.4 65.888,49.708 67.183,48.412 R212.2
IGBT_CTRL_3: P300.4
LED_0_PWM_2: P202.2 U200.12 | length 9.8
  Top Layer w0.254: P202.2 65.162,7.021 U200.12
LED_0_PWM_3: P301.2 R300.2 | length 42.8
  Bottom Layer w0.254: R300.2 93.092,34.926 92.456,34.29 92.456,12.275 93.555,11.176 109.271,11.176 P301.2
LED_1_PWM_2: P202.4 U200.13 | length 9.1
  Top Layer w0.254: U200.13 65.812,5.384 P202.4
LED_1_PWM_3: P301.4 R301.2 | length 39.8
  Bottom Layer w0.254: R301.2 93.174,30.309 92.964,30.099 92.964,12.573 93.853,11.684 111.303,11.684 P301.4
LED_2_PWM_2: P202.6 U200.14 | length 9.9
  Top Layer w0.254: U200.14 66.462,7.274 P202.6
LED_2_PWM_3: P301.6 R302.2 | length 36.4
  Bottom Layer w0.254: R302.2 93.853,24.892 93.472,24.511 93.472,12.954 94.234,12.192 113.335,12.192 P301.6
NetC203_1: C203.1 U200.4 | length 5.3
  Top Layer w0.254: U200.4 68.412,18.583 68.58,18.415 70.993,18.415 71.413,18.835 C203.1
NetC303_1: C303.1 R304.2 U301.3 | length 7.6
  Top Layer w0.508: U301.3 126.873,12.319 127.574,11.618 C303.1 128.971,11.811 R304.2
NetD100_1: D100.1 pad.0@3.175,37.592 Q106.2 Q106.4 R100.1 R111.2 R112.2 | length 36.6
  Top Layer w0.508: pad.0@3.175,37.592 3.175,38.132 3.646,38.603 3.646,39.46 4.501,40.315 4.501,41.248 5.733,42.48 5.733,42.596 8.433,42.596 ; 13.832,43.078 13.832,43.826 12.802,44.856 12.802,45.811 14.632,45.811 R111.2
  Top Layer w1.27: 8.433,42.596 12.649,42.596 13.132,43.078 13.832,43.078 13.857,43.053 R100.1
  Bottom Layer w0.508: Q106.4@7.188,33.071 9.04,33.071
  Bottom Layer w0.762: pad.0@3.175,37.592 2.413,36.83 D100.1 4.05,35.828 4.953,34.925 6.477,34.925 6.604,35.052 ; 9.04,33.071 Q106.2
NetD102_2: D102.2 R108.1 R110.1 | length 5
  Top Layer w0.254: D102.2@16.51,17.494 16.358,17.646 16.358,18.694 17.413,19.749 R110.1 R108.1
NetD103_1: D103.1 D107.2 P100.1 | length 14.3
  Top Layer w1.27: D103.1 36.002,35 P100.1
  Bottom Layer w1.27: D107.2 36.002,35 P100.1
NetD103_2: D103.2 D104.2 D105.1 Q102.2 R124.2 | length 27.5
  Top Layer w1.27: R124.2@16.782,32.055 18.973,32.055 18.973,31.7 22.428,28.245 Q102.2 22.428,24.282 23.216,23.495 29.083,23.495 29.718,24.13 29.718,26.554 35.408,26.554 D104.2@35.495,26.467
NetD104_1: D104.1 D108.2 P101.1 | length 19.1
  Top Layer w1.27: P101.1 40.513,20.701 40.513,26.049 D104.1@40.095,26.467
  Bottom Layer w1.27: P101.1 40.513,20.701 D108.2@40.513,26.289
NetD105_2: D105.2 D106.1 pad.0@27.432,21.031 Q102.1 Q105.3 R115.2 | length 16.6
  Top Layer w0.508: Q105.3@26.06,21.006 D106.1@29.21,21.006
  Top Layer w1.27: Q102.1 24.968,28.245 26.11,29.386 D105.2@26.11,32.055
  Bottom Layer w0.508: Q102.1 25.095,26.06 26.035,26.06 26.402,25.693 R115.2 27.127,21.336 pad.0@27.432,21.031
NetD109_3: D109.3 R119.1 | length 5.9
  Bottom Layer w0.254: R119.1 18.034,18.642 D109.3
NetD111_1: D111.1 R122.2 | length 3.1
  Bottom Layer w1.27: R122.2 14.238,27 D111.1
NetD300_1: D300.1 pad.0@93.853,38.1 R300.1 | length 6.3
  Top Layer w0.254: pad.0@93.853,38.1 96.012,38.1 D300.1@97.917,36.195
  Bottom Layer w0.254: R300.1 pad.0@93.853,38.1
NetD301_1: D301.1 pad.0@93.853,33.484 R301.1 | length 6.1
  Top Layer w0.254: pad.0@93.853,33.484 96.489,33.484 D301.1
  Bottom Layer w0.254: R301.1 pad.0@93.853,33.484
NetD302_1: D302.1 pad.0@93.853,28.867 R302.1 | length 5.9
  Top Layer w0.254: pad.0@93.853,28.867 96.978,28.867 D302.1
  Bottom Layer w0.254: R302.1 pad.0@93.853,28.867
NetP102_1: P102.1 R120.1 | length 8
  Bottom Layer w1.27: R120.1 3.937,20.193 P102.1
NetP203_2: P203.2 Q201.2 R206.2 U201.7 | length 15
  Top Layer w0.254: Q201.2 48.226,31.03 46.863,29.667 46.863,27.305 P203.2 49.022,26.67 U201.7 52.451,26.67 52.705,26.416 52.705,25.146 53.086,24.765 R206.2
NetQ100_1: Q100.1 R108.2 | length 3.6
  Top Layer w0.254: R108.2 20.638,21.449 21.285,20.803 21.285,19.128 Q100.1
NetQ100_3: Q100.3 Q105.1 R107.2 | length 8
  Top Layer w0.254: Q100.3 23.944,21.218 25.11,20.051 Q105.1@25.11,19.219 ; R107.2@22.25,17.45 Q100.3@22.25,21.218
NetQ102_3: Q102.3 R109.2 R119.2 | length 6.1
  Top Layer w1.27: R109.2@15.773,25.911 16.05,26.187 Q102.3
  Bottom Layer w0.762: R119.2 19.876,26.199 Q102.3
NetQ106_1: Q106.1 R126.1 R127.2 | length 12.1
  Bottom Layer w0.762: Q106.1 17.108,35.371 18.186,36.449 R127.2 18.821,38.598 R126.1
NetQ106_3: pad.0@23.876,44.196 Q106.3 R100.2 R101.1 R125.1 | length 26.6
  Top Layer w0.762: R100.2@22.92,43.053 23.876,43.053 ; pad.0@23.876,44.196 23.876,43.053 ; R101.1@25.001,43.053 23.876,43.053
  Bottom Layer w0.762: Q106.3 15.404,30.771 16.51,31.877 17.653,31.877 21.463,35.687 22.606,35.687 24.257,37.338 24.257,43.815 23.876,44.196 23.866,44.206 R125.1 R125.1@21.645,44.286
NetQ107_1: Q107.1 R128.2 | length 2.4
  Bottom Layer w0.762: Q107.1 15.469,43.775 R128.2
NetQ107_2: Q107.2 Q107.4 R127.1 | length 9.1
  Bottom Layer w0.762: Q107.4 Q107.2 15.126,41.133 R127.1
NetQ200_1: Q200.1 R207.1 | length 2
  Top Layer w0.254: R207.1 60.286,28.187 Q200.1
NetQ201_1: Q201.1 R208.1 | length 4.1
  Top Layer w0.254: Q201.1@48.226,33.97 48.326,33.87 R208.1
NetQ202_1: Q202.1 Q203.1 R211.1 | length 9.1
  Top Layer w0.254: Q203.1 66.294,40.661 66.495,40.46 67.31,40.46 ; R211.1 68.138,37.78 67.31,38.608 67.31,40.46 ; Q202.1 69.035,40.46 67.31,40.46
NetQ202_2: Q202.2 Q203.2 R212.1 | length 7.5
  Top Layer w0.254: Q203.2 64.394,43.058 64.936,43.6 R212.1 67.222,43.561 67.945,43.561 68.204,43.302 Q202.2
NetQ204_1: Q204.1 R214.1 | length 5.6
  Top Layer w0.254: R214.1 64.24,35.792 64.755,36.307 66.025,36.307 66.294,36.576 Q204.1
NetQ204_3: Q204.3 R210.2 R211.2 | length 5
  Top Layer w0.254: Q204.3 68.084,35.238 R211.2 R210.2
NetR101_2: R101.2 R102.1 | length 5.6
  Top Layer w1.27: R102.1 R101.2@29.101,43.053
NetR102_2: R102.2 R103.1 | length 2.1
  Top Layer w1.27: R103.1 R102.2
NetR103_2: R103.2 R104.1 | length 2.1
  Top Layer w1.27: R104.1 R103.2
NetR104_2: R104.2 R105.1 | length 2.1
  Top Layer w1.27: R105.1 R104.2
NetR105_2: R105.2 R106.1 | length 5.4
  Top Layer w1.27: R106.1@6.459,32.055 R105.2
NetR106_2: R106.2 R124.1 | length 2.1
  Top Layer w1.27: R106.2@10.559,32.055 R124.1@12.682,32.055
NetR120_2: R120.2 R121.1 | length 2.1
  Bottom Layer w1.27: R120.2 5.974,27.036 R121.1
NetR121_2: R121.2 R122.1 | length 1.9
  Bottom Layer w1.27: R121.2 R122.1
NetR125_2: R125.2 R126.2 | length 1.8
  Bottom Layer w1.27: R125.2 21.565,40.523 R126.2
NetR207_2: R207.2 U201.2 | length 2.2
  Top Layer w0.254: U201.2 57.404,26.67 57.912,27.178 R207.2
NetR208_2: R208.2 U201.6 | length 5.8
  Top Layer w0.254: U201.6 52.324,27.94 52.832,28.448 52.832,30.353 52.324,30.861 R208.2
POWER_ON_OFF_1: P103.6 R128.1 | length 9.5
  Bottom Layer w0.254: R128.1 15.469,48.616 15.875,49.022 21.971,49.022 P103.6
POWER_ON_OFF_2: P201.6 pad.0@69.084,23.495 pad.0@69.088,26.543 U200.3 | length 33.6
  Top Layer w0.254: P201.6 68.428,49.708 69.723,48.412 69.723,45.847 72.771,42.799 72.771,30.226 pad.0@69.088,26.543 ; U200.3 pad.0@69.062,23.495
  Bottom Layer w0.254: pad.0@69.084,23.495 69.088,23.499 pad.0@69.088,26.543
POWER_ON_OFF_3: P300.6
SHORT_DETECT_1: D109.1 D113.1 P103.5 pad.0@15.697,19.406 pad.0@27.915,17.805 | length 78.2
  Top Layer w0.254: pad.0@15.697,19.406 15.113,18.821 15.113,13.589 15.621,13.081 17.272,13.081 17.78,13.589 17.78,14.224 19.685,16.129 27.203,16.129 27.915,16.84 pad.0@27.915,17.805 ; P103.5 24.511,49.022 26.855,49.022 28.1,47.777 D113.1
  Bottom Layer w0.254: pad.0@15.672,19.355 17.018,20.701 17.018,27.051 17.526,27.559 19.83,27.559 28.245,35.974 28.245,38.615 29.718,40.088 29.718,46.159 26.83,49.047 24.536,49.047 P103.5 ; D109.1 22.302,18.618 23.114,17.805 pad.0@27.915,17.805
SHORT_DETECT_2: C208.2 P201.5 R209.1 U200.7 | length 54.1
  Top Layer w0.254: R209.1 63.373,18.161 63.754,17.78 65.786,17.78 66.462,18.456 U200.7 66.462,24.044 67.31,24.892 70.358,24.892 73.914,28.448 C208.2 73.953,47.117 74.447,47.117 74.854,47.523 74.854,49.809 74.498,50.165 73.66,50.165 72.136,51.689 67.437,51.689 67.183,51.435 67.183,49.505 68.428,48.26 P201.5
SHORT_DETECT_3: P300.5
SWCLK_2: P200.1 R201.2 U200.20 | length 17.8
  Top Layer w0.254: U200.20 70.362,13.06 69.012,11.709 68.301,11.709 68.021,11.43 68.021,10.109 68.021,9.017 68.326,8.712 71.196,8.712 72.644,10.16 P200.1 R201.2
SWDIO_2: P200.3 R200.2 U200.19 | length 18
  Top Layer w0.254: U200.19 69.712,15.61 69.977,15.875 73.787,15.875 74.422,15.24 ; P200.3 74.422,15.24 ; R200.2 77.343,11.176 77.089,11.43 74.803,11.43 74.422,11.811 74.422,15.24
USART_RTX_2: Q200.2 R204.1 R205.2 U200.8 U201.3 | length 25.4
  Top Layer w0.254: U201.3@56.708,28.006 U201.3 57.404,27.94 58.166,28.702 59.436,28.702 59.944,29.21 59.944,30.353 60.386,30.795 Q200.2 61.788,30.795 62.103,30.48 62.103,27.686 61.595,27.178 61.595,24.181 62.572,23.204 R204.1@62.572,20.232 ; R205.2 61.595,25.654 ; R204.1 63.246,19.939 63.627,19.558 63.627,18.796 64.008,18.415 65.532,18.415 65.812,18.695 U200.8
ZERO_CROSS_1: P103.3 R111.1 | length 7
  Top Layer w0.254: R111.1 15.506,47.637 16.891,49.022 19.431,49.022 P103.3
ZERO_CROSS_2: P201.3 pad.0@60.325,33.367 pad.0@67.437,23.495 U200.6 | length 33.1
  Top Layer w0.254: pad.0@60.325,33.367 62.103,35.145 62.103,42.037 65.888,45.822 P201.3 ; U200.6 67.112,23.17 pad.0@67.437,23.495
  Bottom Layer w0.254: pad.0@60.406,33.447 67.437,26.416 pad.0@67.437,23.495
ZERO_CROSS_3: P300.3
pads on no net: P104.1 P104.2 P104.3 P104.4 P104.5 P104.6 P104.7 P104.8 U200.2

## Polygon pours and split planes (outlines as drawn)
GND_3 on Top Overlay "Bottom Layer-No Net" (hatched 45Degree grid 0.381 track 0.127): 96.901,43.561 126.873,43.561 126.873,18.923 96.901,18.923 96.901,24.511 99.314,24.511 99.314,37.846 96.901,37.846
NetR101_2 on Top Layer "Bottom Layer-No Net" (hatched 45Degree grid 0.508 track 0.203, pour order 6): 27.94,35.814 30.607,35.814 30.607,38.735 32.893,41.021 34.29,42.418 37.846,42.418 37.846,44.653 27.94,44.653
NetD100_1 on Top Layer "Bottom Layer-No Net" (hatched 45Degree grid 0.508 track 0.203, pour order 4): 19.558,45.72 19.558,41.148 8.636,41.148 8.636,43.434 11.049,45.847 19.558,45.847
GND_2 on Top Layer "Bottom Layer-No Net" (hatched 45Degree grid 0.508 track 0.203, remove dead copper, pour order 0): 46.482,37.949 53.086,37.949 54.565,36.47 54.565,24.95 55.88,23.635 55.88,17.883 55.118,17.121 54.184,16.187 46.31,16.187 48.596,10.599 51.644,6.789 55.581,3.614 59.944,1.5 63.455,0.566 67.265,0.185 71.202,0.566 74.676,1.5 78.695,3.36 82.363,6.169 85.553,9.964 86.823,12.25 87.884,14.708 88.728,17.33 89.326,20.378 89.326,26.766 89.326,30.411 88.976,33.459 87.884,39.219 85.807,42.984 83.013,46.54 79.457,49.461 75.438,51.665 71.583,52.763 67.546,53.172 63.328,52.763 59.309,51.665 54.565,49.08 50.328,45.369 47.117,39.473 47.117,39.346 47.117,38.457 46.609,37.949
GND_3 on Top Layer "Topp Layer-No Net" (hatched 90Degree grid 0.508 track 0.203, remove dead copper, pour order 15): 90.424,11.684 92.202,11.684 93.98,9.906 118.11,9.906 120.904,12.7 126.746,12.7 127.762,11.684 134.112,11.684 134.112,11.938 136.398,14.224 136.398,50.038 134.112,52.324 127.508,52.324 127.508,51.054 127.254,50.8 126.746,50.292 112.522,50.292 110.566,52.248 110.566,52.375 100.127,52.375 100.076,52.324 100.076,54.356 99.314,55.118 95.758,55.118 94.742,54.102 94.488,53.848 94.488,44.958 91.948,44.958 92.202,44.704 92.202,11.684 90.424,11.684 90.424,62.127 138.424,62.127 138.424,0.127 90.424,0.127
GND_2 on Bottom Layer "Bottom Layer-No Net" (hatched 45Degree grid 0.508 track 0.203, remove dead copper, pour order 2): 46.4,37.905 53.004,37.905 54.483,36.426 54.483,24.906 55.798,23.591 55.798,17.839 55.036,17.077 54.102,16.143 46.228,16.143 48.514,10.555 51.562,6.745 55.499,3.57 59.862,1.456 63.373,0.522 67.183,0.141 71.12,0.522 74.594,1.456 78.613,3.316 82.281,6.125 85.471,9.92 86.741,12.206 87.802,14.664 88.646,17.286 89.244,20.334 89.244,26.721 89.244,30.367 88.894,33.415 87.802,39.175 85.725,42.94 82.931,46.496 79.375,49.417 75.356,51.621 71.501,52.719 67.464,53.127 63.246,52.719 59.227,51.621 54.483,49.036 50.246,45.325 47.035,39.429 47.035,39.302 46.736,38.608 46.527,37.905
GND_3 on Bottom Layer "Bottom Layer-No Net" (hatched 45Degree grid 0.508 track 0.203, remove dead copper, pour order 12): 90.424,44.958 94.488,44.958 94.488,54.102 95.504,55.118 99.568,55.118 100.076,54.61 100.076,52.578 100.076,52.07 100.33,51.816 110.744,51.816 110.744,51.689 111.76,50.673 138.297,50.673 138.424,50.8 138.424,62.224 138.43,62.23 90.424,62.23 90.424,44.958
GND_3 on Bottom Layer "Bottom Layer-No Net" (hatched 45Degree grid 0.508 track 0.203, remove dead copper, pour order 14): 90.424,11.938 119.253,11.938 120.523,13.208 133.56,13.208 135.763,15.411 135.763,49.149 132.588,52.324 122.936,52.324 122.936,62.127 138.327,62.127 138.43,62.23 138.43,0.26 138.424,0.254 90.424,0.254 90.424,11.938
GND_COM on Bottom Layer "Bottom Layer-No Net" (hatched 45Degree grid 0.508 track 0.203, remove dead copper, pour order 17): 45.618,35.712 52.172,35.712 52.553,35.331 52.553,24.181 53.95,22.784 53.95,18.593 53.213,17.856 45.618,17.856 45.618,35.687

## Keep-outs
Keep-Out Layer:
  lines w0.254: 44,31.115 45.212,31.115 cw(c67.212,31.115) 89.212,31.239 90.421,31.239 ; 44,31.124 ccw(c22,31) 0,31 0,22 ccw(c22,22) 44,21.876 44,22.029 44.086,22.115 45.212,22.115 ccw(c67.212,22.115) 89.212,21.991 90.424,21.991 90.424,0.127 138.424,0.127 138.424,62.127 90.424,62.127 90.424,31.242

## Other copper
Top Layer:
  rectangle net GND_1: 13.716,4.953 15.621,9.271
  rectangle net GND_1: 14.986,8.001 17.653,12.573
  rectangle net GND_1: 14.986,20.32 16.764,21.844
  rectangle net GND_1: 14.986,20.955 18.415,23.241
  rectangle net +3V3_1: 24.765,7.493 30.734,15.748
  rectangle net GND_COM: 49.682,29.21 51.142,32.283
  rectangle net GND_COM: 46.33,19.202 50.546,21.234
Bottom Layer:
  rectangle net GND_1: 23.935,19.118 26.035,19.939
  rectangle net GND_1: 18.669,19.939 26.035,23.114
  rectangle net +3V3_1: 24.765,7.493 30.734,16.891
  rectangle net NetQ107_2: 7.798,39.268 12.878,43.993
  rectangle net NetD100_1: 5.715,30.226 10.744,35.865

## Silkscreen, mask and mechanical layers (free items; w line width, h text height)
Top Overlay:
  circle w1: c114.5,31 r7
  circle w0.254: c114.554,9.906 r3
  circle w0.254: c114.3,52.324 r3
  text "Ambient light / sensor hole" at 109.474,46.228 h0.8
  text "IR sensor / light hole" at 110.744,13.462 h0.8
Mechanical 1:
  lines w0.254: 96.901,24.257 96.901,37.973 ; 96.901,18.796 96.901,24.511 99.314,24.511 99.314,37.846 96.901,37.846 96.901,43.688 126.873,43.688 126.873,18.796 96.901,18.796

## Dimensions
96.901,18.796 to 126.873,18.796 on Mechanical 1
126.873,43.688 to 126.873,18.796 on Mechanical 1
138.424,62.127 to 138.424,0.127 on Mechanical 1
138.424,62.127 to 90.424,62.127 on Mechanical 1
0,31 to 44,31.124 on Mechanical 1
22,53 to 22,0 on Mechanical 1

## Text inside footprints (layer, text, board x,y; h text height)
P103: Top Overlay "8" at 27.305,49.784 h0.51; Top Overlay "7" at 27.305,47.244 h0.51; Top Overlay "1" at 16.383,47.371 h0.51; Top Overlay "2" at 16.256,50.038 h0.51
P104: Top Overlay "8" at 27.305,4.75 h0.51; Top Overlay "7" at 27.305,2.21 h0.51; Top Overlay "1" at 16.129,2.21 h0.51; Top Overlay "2" at 16.002,4.877 h0.51
P201: Top Overlay "8" at 72.492,49.733 h0.51; Top Overlay "7" at 72.492,47.193 h0.51; Top Overlay "1" at 61.316,47.193 h0.51; Top Overlay "2" at 61.189,49.733 h0.51
P202: Top Overlay "8" at 72.542,4.75 h0.51; Top Overlay "7" at 72.542,2.21 h0.51; Top Overlay "1" at 61.366,2.21 h0.51; Top Overlay "2" at 61.239,4.75 h0.51
P300: Top Overlay "8" at 119.71,54.407 h0.51; Top Overlay "7" at 119.71,51.867 h0.51; Top Overlay "1" at 108.534,51.867 h0.51; Top Overlay "2" at 108.407,54.661 h0.51
P301: Top Overlay "8" at 119.761,9.322 h0.51; Top Overlay "7" at 119.761,6.782 h0.51; Top Overlay "1" at 108.585,6.782 h0.51; Top Overlay "2" at 108.458,9.449 h0.51